# EAGLE board rocketgps (EAGLE 5.11)
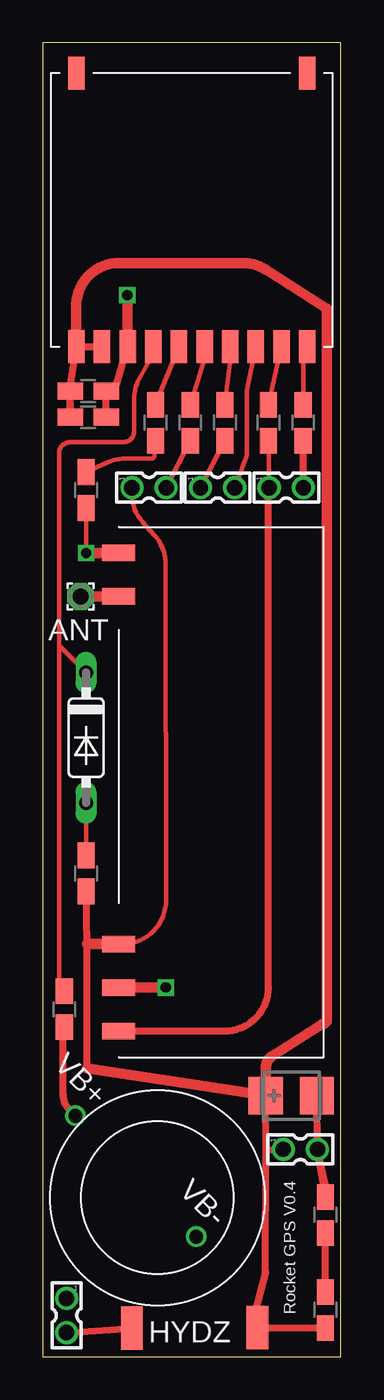
[diagram p0: board, top side]
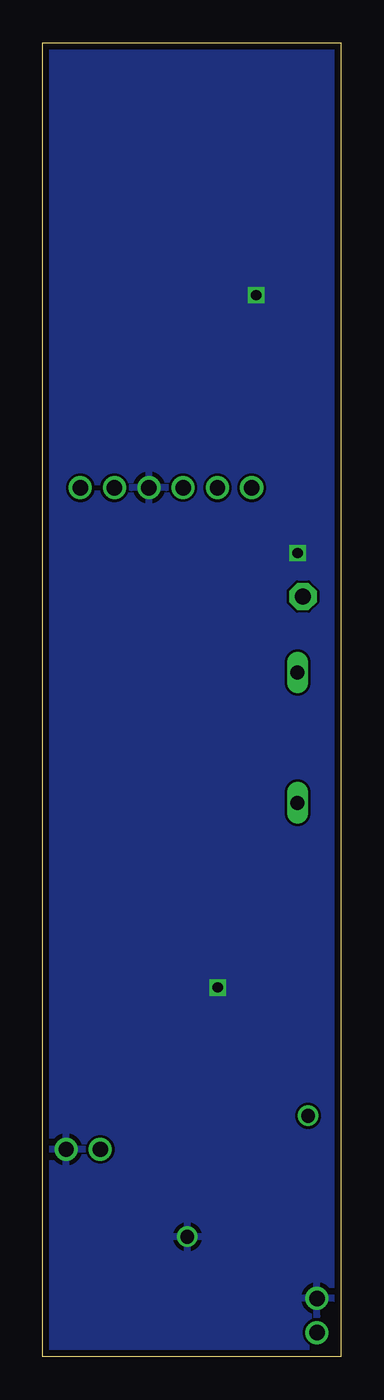
[diagram p1: board, bottom side, seen from below]

Size 17.45 x 76.83 mm. Coordinates in mm from the lower left corner, seen from the top.
Outline: 0,0 17.45,0 17.45,76.83 0,76.83 0,0
Copper layers (1*16): Top 0.0356mm / dielectric 1.5011mm / Bottom 0.0356mm
Design rules "LaenPCBOrder *": minimum track width 6mil, minimum drill 13mil, track to track 6mil, track to pad 6mil, pad to pad 6mil, via to via 6mil, smd to smd 6mil, copper to edge 15mil, drill to drill 6mil, minimum pad ring 7mil, minimum via ring 7mil, stop-mask expansion 6mil, vias tented up to drill 0mil, thermal gap 10mil

## Footprints (pad centres in the part's own frame; a part is rotated, then mirrored left to right if it is on the bottom)
1,6/0,9 = drill 0.914 pad 1.6 octagon: 1 0,0
CT3528 = smd 2 x 2.2: + -1.5,0; - 1.5,0
DO35-7 = drill 0.813 long: A 3.81,0; C -3.81,0
FGPMMOPA6B = smd 1.93 x 0.965: P$1 0,12; P$2 0,10.5; P$3 0,9; P$4 0,7.5; P$5 0,6; P$6 0,4.5; P$7 0,3; P$8 0,1.5; P$9 0,0; P$10 0,-1.5; P$11 16,12; P$12 16,-1.5
SMD1,27-2,54 = smd 1.27 x 2.54: 1 0,0
R0805W = smd 1.5 x 1: 1 -1.052,0; 2 1.052,0
VL1220 = drill 0.8 round: VB+ 10,0; VB- 0,0
ER400TS = smd 1.93 x 0.965: ANT 0,27.94; GND 0,5.08; RFGND 0,30.48; TXD 0,2.54; VCC 0,7.62
87758-0216 = drill 0.9 pad 1.27 round: 1 0,-1; 2 0,1

## Placement (x,y rotation side)
ANT  WIREPAD1,6/0,9  [1,6/0,9]  2.22,44.45 0 top
C1  [CT3528]  14.54,15.27 0 top
D1  1N4148DO35-7  [DO35-7]  2.54,36.2 270 top
FGPMMOPA6B  FGPMMOPA6B  [FGPMMOPA6B]  13.97,59.05 90 top
HYDZ  [SMD1,27-2,54]  5.21,1.68 0 top
PAD1  [SMD1,27-2,54]  12.57,1.7 0 top
R1  220  [R0805W]  16.54,8.29 270 top
R2  220  [R0805W]  2.67,54.93 180 top
R3  220  [R0805W]  2.67,56.45 180 top
R4  220  [R0805W]  16.54,2.74 270 top
R5  220  [R0805W]  2.55,50.67 270 top
R6  18  [R0805W]  1.27,20.32 270 top
R7  220  [R0805W]  2.54,28.26 270 top
R-3D-FIX  330  [R0805W]  6.6,54.61 90 top
R-DMINUS  33  [R0805W]  10.67,54.61 90 top
R-DPLUS  33  [R0805W]  8.64,54.61 90 top
R-RXD  330  [R0805W]  15.24,54.61 90 top
R-TXD  330  [R0805W]  13.21,54.61 90 top
U$1  VL1220  [VL1220]  8.99,7.02 135 top
U$2  ER400TS  [ER400TS]  4.45,16.51 0 top
X1  87758-0216  [87758-0216]  14.25,50.81 270 top
X2  87758-0216  [87758-0216]  10.24,50.81 270 top
X3  87758-0216  [87758-0216]  6.22,50.81 270 top
X4  87758-0216  [87758-0216]  1.4,2.41 180 top
X5  87758-0216  [87758-0216]  15.08,12.13 270 top

## Library data of the parts
ANT HYDZ PAD1 = wirepad
C1 R1-R7 R-3D-FIX R-DMINUS R-DPLUS R-RXD R-TXD = rcl
D1 = diode
FGPMMOPA6B U$1 U$2 = Kev
X1-X5 = con-molex; MPN: 87758-0216; OC_FARNELL: unknown; OC_NEWARK: 94M1513

## Nets
GND: C1.- FGPMMOPA6B.P$3 FGPMMOPA6B.P$8 R1.1 R2.1 R3.1 R5.2 U$1.VB- U$2.GND U$2.RFGND X2.2 X4.1 X5.2
N$1: FGPMMOPA6B.P$10 R-RXD.2
N$2: FGPMMOPA6B.P$9 R-TXD.2
N$3: FGPMMOPA6B.P$7 R-DMINUS.2
N$4: FGPMMOPA6B.P$6 R-DPLUS.2
N$5: FGPMMOPA6B.P$5 R-3D-FIX.2
N$6: U$2.TXD
N$7: R1.2 R4.1
N$8: R-TXD.1 X1.1
N$9: ANT.1 U$2.ANT
N$10: D1.C FGPMMOPA6B.P$4 R6.1
N$11: R5.1 R-3D-FIX.1
N$12: R6.2 U$1.VB+
N$13: D1.A R7.1
N$14: R-DMINUS.1 X2.1
N$15: R-DPLUS.1 X3.2
N$16: R-RXD.1 X1.2
N$17: HYDZ.1 X4.2
VCC: C1.+ FGPMMOPA6B.P$1 FGPMMOPA6B.P$2 PAD1.1 R2.2 R3.2 R4.2 R7.2 U$2.VCC X3.1 X5.1

## Tracks (layer width: path | path; a pad name or v marks a point on that pad's centre or on a via)
GND  (via drill 0.6)
  Top 0.152: C1.- 16.51,15.24 | 16.41,10.14 16.51,10.16
  Top 0.254: U$2.RFGND 4.48,46.96 | v2.54,46.99 R5.2 | FGPMMOPA6B.P$8 11.94,56.52 11.94,52.7 X2.2
  Top 0.406: R1.1 16.41,10.14 X5.2 | 16.51,10.16 16.07,12.13 C1.- | FGPMMOPA6B.P$3 4.32,56.83 R3.1 R2.1
  Top 0.61: U$2.GND v7.21,21.59 | U$2.RFGND v2.54,46.99 | FGPMMOPA6B.P$3 v4.95,62.07
  pour Bottom: 0,0 17.43,0.04 17.56,76.91 0,76.83
N$1
  Top 0.254: FGPMMOPA6B.P$10 15.24,59.69 | FGPMMOPA6B.P$10 15.56,59.05 | R-RXD.2 15.24,58.42 FGPMMOPA6B.P$10
N$2
  Top 0.254: 13.34,55.56 R-TXD.2 FGPMMOPA6B.P$9
N$3
  Top 0.254: FGPMMOPA6B.P$7 11.05,58.79 10.67,55.75 11.05,55.73 R-DMINUS.2
N$4
  Top 0.254: FGPMMOPA6B.P$6 9.43,58.2 9.4,58.17 R-DPLUS.2
N$5
  Top 0.254: 6.6,55.69 FGPMMOPA6B.P$5
  Top 0.406: R-3D-FIX.2 6.6,55.69
N$6
  Top 0.406: U$2.TXD 10.67,19.05 arc90 13.21,21.59 13.21,50.86
N$7
  Top 0.406: R4.1 R1.2
N$8
  Top 0.254: X1.1 R-TXD.1
N$9
  Top 0.61: ANT.1 U$2.ANT
N$10
  Top 0.254: FGPMMOPA6B.P$4 6.35,58.42 6.16,59.16 6.16,58.1 5.67,57.23 arc30 5.35,55.94 5.34,54.17 arc-96 4.71,53.47 1.59,53.47 arc96 0.96,52.76 0.95,41.59 | 0.95,21.37 0.95,41.59 | 0.95,41.59 D1.C
  Top 0.305: R6.1 0.95,21.37
N$11
  Top 0.254: R5.1 3.83,52.3 arc-24 4.85,52.51 6.41,52.51 6.54,52.64 6.54,53.49 R-3D-FIX.1
N$12
  Top 0.406: R6.2 1.21,19.27 1.21,15.32 arc45 1.58,14.42 U$1.VB+
N$13
  Top 0.254: R7.1 D1.A
N$14
  Top 0.254: X2.1 R-DMINUS.1
N$15
  Top 0.254: X3.2 R-DPLUS.1
N$16
  Top 0.406: X1.2 R-RXD.1
N$17
  Top 0.406: X4.2 HYDZ.1
VCC
  Top 0.254: 3.81,58.42 FGPMMOPA6B.P$2 3.81,59.69 | U$2.VCC 4.72,24.14 arc90 7.21,26.7 7.19,46.31 arc42 6.55,48.02 5.85,48.8 arc-46 5.21,50.66 X3.1
  Top 0.406: FGPMMOPA6B.P$2 FGPMMOPA6B.P$1 1.59,56.71 R2.2 R3.2 | R7.2 2.6,24.13 2.6,16.86 | 13.06,12.1 C1.+ | 13.06,12.1 X5.1 | 13.06,12.1 13.05,4.97 arc-14 13.03,4.81 12.19,1.61 PAD1.1 R4.2
  Top 0.61: 2.6,24.13 U$2.VCC | FGPMMOPA6B.P$1 1.97,61.34 arc-92 4.47,63.95 11.72,63.95 arc-32 13.06,63.55 16.64,61.28 16.64,19.62 arc-37 16.34,19.43 13.37,17.52 arc56 13.07,17 C1.+ 2.6,16.86

## Text on the board
tNames: Rocket GPS V0.4